# Altium PCB power.PcbDoc
Units mm, origin at the board's own origin, x right, y up, seen from the top; angles counter-clockwise.
Board outline 70 x 48 mm, 2 copper layers (Top Layer, Bottom Layer); 76 components, 42 nets, 185 pads, 23 vias.
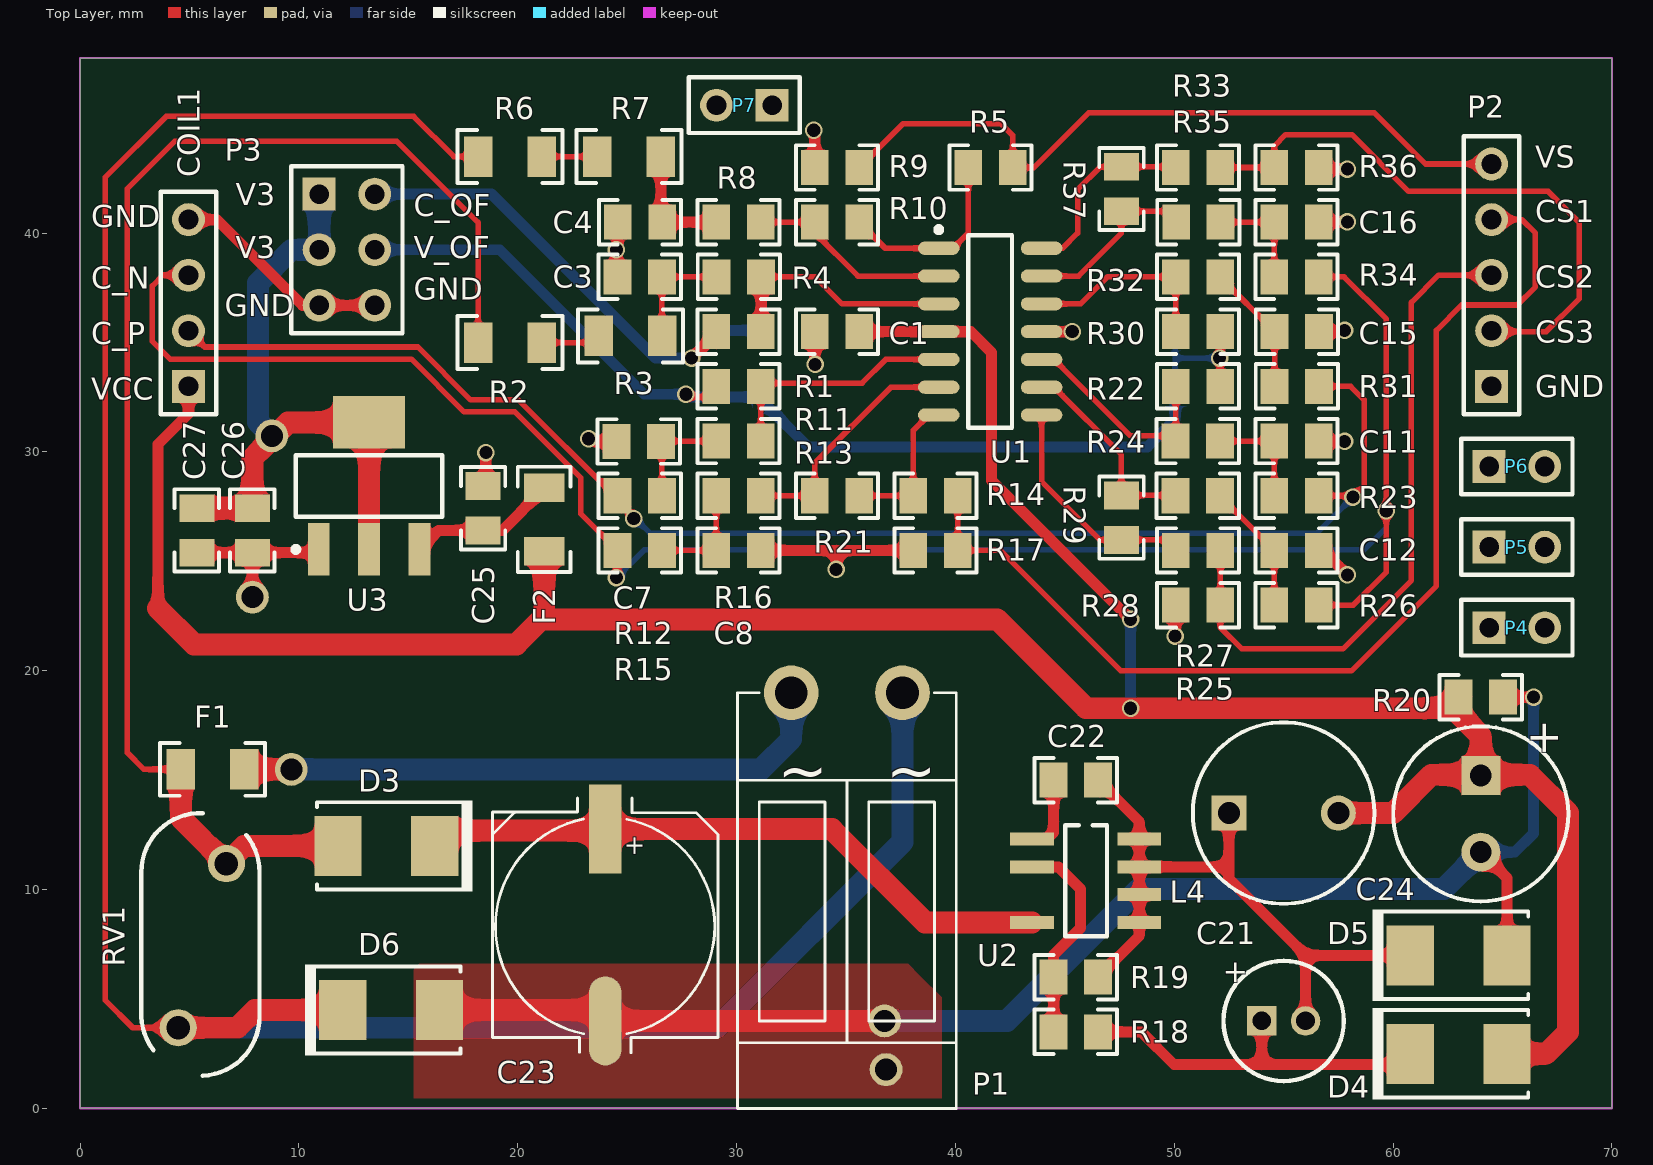
[diagram p0: Top Layer view]
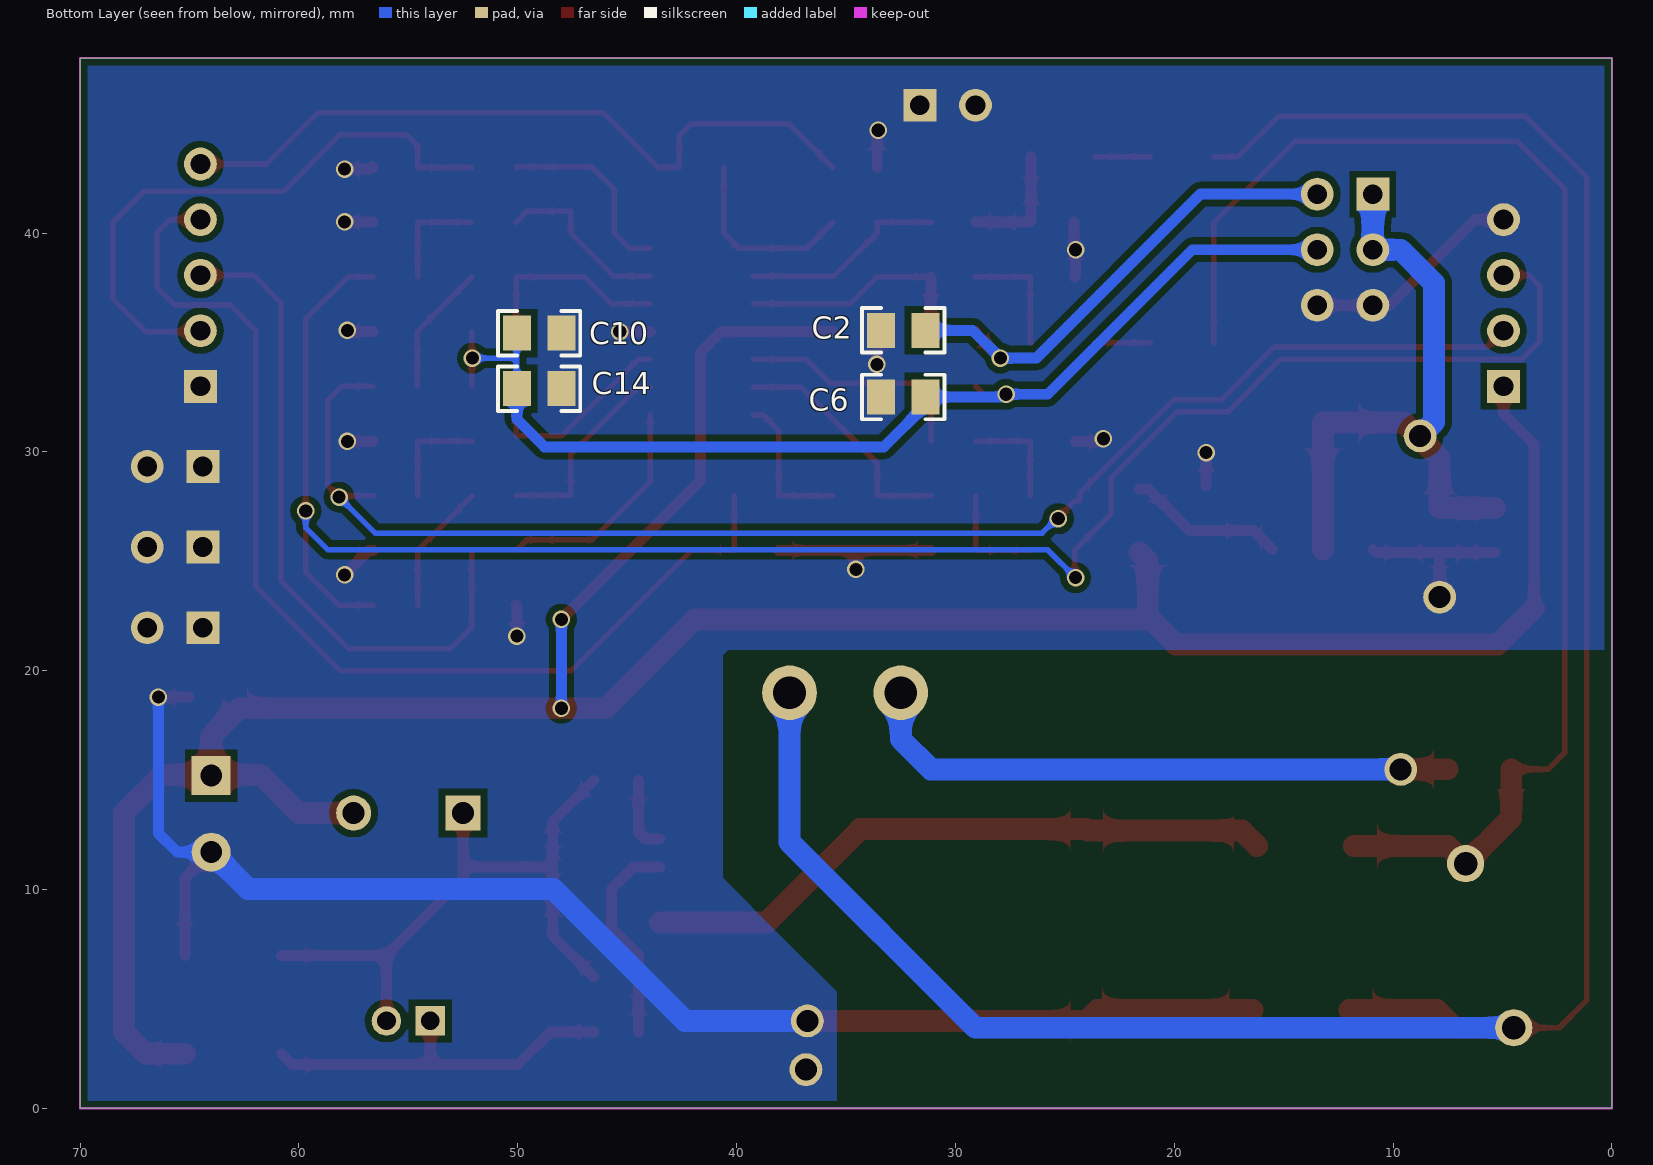
[diagram p1: Bottom Layer view, seen from below]

## Layer stack, top to bottom
Top Solder: solder mask 0.0102, Solder Resist, Dk 3.5
Top Layer: signal copper 0.0356
Dielectric 1: dielectric 0.32, FR-4, Dk 4.8
Bottom Layer: signal copper 0.0356
Bottom Solder: solder mask 0.0102, Solder Resist, Dk 3.5

## Board outline
0,0 0,48 70,48 70,0 69.993,0.007

## Design rules (kind name [scope] priority, off if disabled: settings)
Clearance [All] p1: gap=0.254
HoleSize [All] p1: absolutevalues=TRUE maxlimit=10 minlimit=0.025 maxpercent=80.000 minpercent=20.000
MinimumSolderMaskSliver [All] p1: minsoldermaskwidth=0.1
PolygonConnect [All] p1: connectstyle=Direct reliefconductorwidth=0.254 reliefentries=4 polygonreliefangle="90 Angle" airgapwidth=0.254
RoutingVias [All] p1: holewidth=0.711 width=1.27 viastyle="Through Hole" minholewidth=0.3 minwidth=0.3 maxholewidth=5 maxwidth=5
SilkToSilkClearance [All] p1: silktosilkclearance=0.01
SilkToSolderMaskClearance [IsPad] p1: minsilkscreentomaskgap=0.01 clearancetoexposedcopper=TRUE
SolderMaskExpansion [All] p1: expansion=0.102
Width [All] p1: maxlimit=5 minlimit=0.254 preferedwidth=0.254
26 further rules are at their usual default settings.

## Components (designator, comment, footprint, x,y, rotation, side; value= is the part's Value field where it differs from the comment)
C1 "104" 0805_HV 34.588,35.5 r0 top
C2 "104" 0805_HV 32.385,35.56 r180 bottom
C3 "221" 0805_HV 25.572,38 r0 top
C4 "221" 0805_HV 25.588,40.5 r0 top
C6 "104" 0805_HV 32.385,32.512 r180 bottom
C7 "221" 0805_HV 25.527,30.48 r0 top
C8 "221" 0805_HV 30.088,25.5 r180 top
C10 "104" 0805_HV 49.022,35.433 r0 bottom
C11 "221" 0805_HV 55.588,30.5 r180 top
C12 "221" 0805_HV 55.588,25.5 r180 top
C14 "104" 0805_HV 49.022,32.893 r0 bottom
C15 "221" 0805_HV 55.604,35.5 r180 top
C16 "221" 0805_HV 55.588,40.5 r180 top
C21 "ECA-1HHG100" NHG_500x1100 55,4 r0 top
C22 "104" 0805_HV 45.5,15 r180 top
C23 "400AX6R8M8x11" PANACAP-G-GENERIC 24,8.318 r270 top
C24 "400AX6R8M8x11" CAPPRD350W60D800H1100 64.008,13.462 r270 top
C25 "105" 0805_HV 18.415,27.432 r270 top
C26 "105" 0805_HV 7.874,26.416 r90 top
C27 "105" 0805_HV 5.334,26.416 r90 top
COIL1 "Header 4" HDR1X4 4.953,33 r90 top locked
D3 "US1M-13-F" SMB 14,12 r0 top
D4 "US1M-13-F" SMB 63,2.5 r180 top
D5 "US1M-13-F" SMB 63,7 r180 top
D6 "US1M-13-F" SMB 14.21,4.5 r180 top
F1 "Res" 1206 6.05,15.5 r180 top
F2 "Res" 1206 21.209,26.924 r90 top
L4 "7447480331" IND_WE-TI_8095 55,13.5 r0 top
P1 "Header 2" CON200 35.04,19 r0 top
P2 "Header 5" HDR1X5 64.5,33 r90 top locked
P3 "Header 3X2" HDR2X3 10.922,41.783 r270 top
P4 "Header 2" HDR1X2 64.389,21.971 r0 top
P5 "Header 2" HDR1X2 64.389,25.654 r0 top
P6 "Header 2" HDR1X2 64.389,29.337 r0 top
P7 "Header 2" HDR1X2 31.623,45.847 r180 top
R1 "22K" 0805_HV 30.088,35.5 r180 top
R2 "1.2M" 1206 19.638,35 r0 top
R3 "1.2M" 1206 25.146,35.306 r0 top
R4 "2.2K" 0805_HV 30.104,38 r180 top
R5 "10K" 0805_HV 41.604,43 r180 top
R6 "1.2M" 1206 19.638,43.5 r0 top
R7 "1.2M" 1206 25.088,43.5 r0 top
R8 "2.2K" 0805_HV 30.088,40.5 r180 top
R9 "10K" 0805_HV 34.588,43 r180 top
R10 "22K" 0805_HV 34.588,40.5 r180 top
R11 "22K" 0805_HV 30.088,33 r180 top
R12 "1.2M" 0805_HV 25.572,28 r180 top
R13 "2.2K" 0805_HV 30.088,30.5 r180 top
R14 "10K" 0805_HV 39.088,28 r180 top
R15 "1.2M" 0805_HV 25.572,25.5 r180 top
R16 "2.2K" 0805_HV 30.088,28 r180 top
R17 "10K" 0805_HV 39.088,25.5 r180 top
R18 "13k" 0805_HV 45.5,3.5 r0 top
R19 "2K" 0805_HV 45.5,6 r180 top
R20 "3k3" 0805_HV 64.008,18.796 r180 top
R21 "22K" 0805_HV 34.588,28 r180 top
R22 "22K" 0805_HV 51.088,33 r0 top
R23 "1.2M" 0805_HV 55.588,28 r0 top
R24 "2.2K" 0805_HV 51.072,30.5 r0 top
R25 "10K" 0805_HV 51.088,25.5 r180 top
R26 "1.2M" 0805_HV 55.588,23 r0 top
R27 "2.2K" 0805_HV 51.072,28 r0 top
R28 "10K" 0805_HV 51.088,23 r180 top
R29 "22K" 0805_HV 47.588,27 r90 top
R30 "22K" 0805_HV 51.088,35.5 r0 top
R31 "1.2M" 0805_HV 55.604,33 r0 top
R32 "2.2K" 0805_HV 51.088,38 r0 top
R33 "10K" 0805_HV 51.088,43 r180 top
R34 "1.2M" 0805_HV 55.588,38 r0 top
R35 "2.2K" 0805_HV 51.104,40.5 r0 top
R36 "10K" 0805_HV 55.588,43 r0 top
R37 "22K" 0805_HV 47.588,42.016 r270 top
RV1 "S10K275E2" VAR_S10K275E2 5.5,7.5 r90 top
U1 "LM324" D014_L 41.588,35.5 r0 top
U2 "LNK306" "SOP 7" 43.5,12.31 r0 top
U3 "AMS1117-3.3V SOT223 _MH" SOT223 13.208,28.448 r0 top

## Footprints (in the part's own frame and the unit in brackets; to place one, negate y for a bottom-side part, rotate by r counter-clockwise, add the part's x,y. Pads: shape width x height; smd on the part's side, far side on the other; paste and mask are expansions set on the pad)
0805_HV [mil] "0805 with 30mil clearance between pads"
  rect 50x63 smd: 1(-40,0) 2(40,0)
  silkscreen extent -74,-40 74,40, body extent -43,-29 43,29, height 57
1206 [mm] "1206 from SM-752 data"
  rect 1.3x1.85 smd: 1(1.45,0) 2(-1.45,0)
  silkscreen extent -2.4,-1.21 2.4,1.21, body extent -1.7,-0.9 1.7,0.9, height 1.35
CAPPRD350W60D800H1100 [mm] "Capacitor, Alum, 8x11mm"
  rect 1.78x1.78 hole 1: 1(-1.75,0)
  round 1.78 hole 1: 2(1.75,0)
  silkscreen extent -4,-4 4,4, body extent -4.03,-4.03 4.03,4.02, height 11.79
CON200 [mm]
  round 2.5 hole 1.5: 1(-2.54,0) 2(2.54,0)
  silkscreen extent -5,-19 5,0
D014_L [mm] "14-Pin Small Outline Integrated Circuit 1.27 mm Pitch, IPC High Density"
  oval 1.9x0.6 smd: 1(-2.35,3.81) 2(-2.35,2.54) 3(-2.35,1.27) 4(-2.35,0) 5(-2.35,-1.27) 6(-2.35,-2.54) 7(-2.35,-3.81) 8(2.35,-3.81) 9(2.35,-2.54) 10(2.35,-1.27) 11(2.35,0) 12(2.35,1.27) 13(2.35,2.54) 14(2.35,3.81)
  silkscreen extent -2.47,-4.4 1,4.78, body extent -1.95,-4.33 1.95,4.33, height 1.75
HDR1X2 [mm] "Connector; Header; 2 Position"
  rect 1.5x1.5 hole 0.9: 1(0,0)
  round 1.5 hole 0.9: 2(2.54,0)
  silkscreen extent -1.27,-1.27 3.81,1.27
HDR1X4 [mm] "Connector; Header; 4 Position"
  rect 1.5x1.5 hole 0.9: 1(0,0)
  round 1.5 hole 0.9: 2(2.54,0) 3(5.08,0) 4(7.62,0)
  silkscreen extent -1.27,-1.27 8.89,1.27
HDR1X5 [mm] "Connector; Header; 5 Position"
  rect 1.5x1.5 hole 0.9: 1(0,0)
  round 1.5 hole 0.9: 2(2.54,0) 3(5.08,0) 4(7.62,0) 5(10.16,0)
  silkscreen extent -1.27,-1.27 11.43,1.27
HDR2X3 [mm] "Connector; Header; 3x2 Position"
  rect 1.5x1.5 hole 0.9: 1(0,0)
  round 1.5 hole 0.9: 2(0,2.54) 3(2.54,0) 4(2.54,2.54) 5(5.08,0) 6(5.08,2.54)
  silkscreen extent -1.27,-1.27 6.35,3.81
IND_WE-TI_8095 [mm] "Wurth WE-TI 8095"
  rect 1.6x1.6 hole 1: 1(-2.5,0)
  round 1.6 hole 1: 2(2.5,0)
  silkscreen extent -4.15,-4.15 4.15,4.15, body extent -4.15,-4.15 4.15,4.15, height 10
NHG_500x1100 [mm] "TH, 2-Leads, Dia 5mm,  Lead Spacing 2mm"
  rect 1.35x1.35 hole 0.85: 1(-1,0)
  round 1.35 hole 0.85: 2(1,0)
  silkscreen extent -2.75,-2.75 2.75,2.75, body extent -2.73,-2.75 2.75,2.75, height 12.51
PANACAP-G-GENERIC [mil]
  rect 160x59.06 smd: 1(-175,0)
  oval 160x59.06 smd: 2(170,0)
  silkscreen extent -231,-203 227,203, body extent -233,-203 223,203, height 402
SMB [mm] "Molded Diode, 2-Leads, Body 5.4x3.6mm, IPC Medium Density, based on OnSemi component dimensions"
  rect 2.159x2.743 smd: 1(2.21,0) 2(-2.21,0)
  silkscreen extent -3.17,-2.08 3.94,2.08, body extent -2.7,-1.8 2.7,1.8, height 2.32
"SOP 7" [mm]
  rect 2x0.6 smd: 1(0,0) 2(0,-1.27) 4(0,-3.81) 5(4.9,-3.81) 6(4.9,-2.54) 7(4.9,-1.27) 8(4.9,0)
  silkscreen extent 1.52,-4.44 3.43,0.64
SOT223 [mm]
  rect 1x2.4 smd: 1(-2.3,-2.9) 2(0,-2.9) 3(2.3,-2.9)
  rect 3.3x2.4 smd: 4(0,2.9)
  silkscreen extent -3.47,-3.02 3.35,1.4, body extent -3.25,-3.56 3.25,3.4, height 1.68
VAR_S10K275E2 [mm] "EPCOS"
  round 1.7 hole 1.067: 1(-3.81,1.016) 2(3.69,-1.184)
  silkscreen extent -6,-2.7 6,2.7, body extent -5.98,-2.7 5.98,2.7, height 14.99

## Part data
C1 C2 C3 C4 C6 C7 C8 C10 C11 C12 C14 C15 C16 C22 C25 C26 C27: library part CM, "Cap SMD"
C21: "CAP, AL, 10 µF, 50 V, +/- 20%, TH"
C23 C24: "CAP, AL, 6.8uF, 400V, +/-20%, TH"
COIL1: "Header, 4-Pin"
D3 D4 D5 D6: library part MURS160-13-F, "Diode, Ultrafast, 600V, 1A, SMB"
F1 F2: library part Res-SMD, "Resistor"
L4: "Inductor, Wirewound, Ferrite, 330 µH, 1.4 A, 0.3 ohm, TH"
P1 P4 P5 P6 P7: "Header, 2-Pin"
P2: "Header, 5-Pin"
P3: "Header, 3-Pin, Dual row"
R1 R2 R3 R4 R5 R6 R7 R8 R9 R10 R11 R12 R13 R14 R15 R16 R17 R18 R19 R20 R21 R22 R23 R24 R25 R26 R27 R28 R29 R30 R31 R32 R33 R34 R35 R36 R37: library part R, "Resistor 1/4W"
RV1: "Varistor 275V RMS 10MM Radial, TH"
U1: library part LM324_MH, "Op x 4"
U2: library part Component_1

## Free pads (board coordinates)
  round 1.5 hole 1: 0(9.652,15.494) 0(36.83,1.778) 1(7.874,23.368) 2(8.763,30.734) 4(36.766,4)

## Via types
v1: diameter 0.8, hole 0.6, Top Layer to Bottom Layer, tented both sides, 23 vias

## Nets (pads, with @x,y where several pads share a name; then routed paths per layer and width w, separated by ;. In a path a pad name is that pad's centre, name@x,y a point inside that pad or via, vN(x,y) a via of type N, cw(c..) or ccw(c..) an arc to the next point about the centre after c; other vN are vias at no path point)
BP: C22.2 U2.1 | length 3.5
  Top Layer w0.5: U2.1 44.187,12.31 44.484,12.607 C22.2
C1: R14.2 R21.1 U1.7 | length 6.9
  Top Layer w0.254: R21.1 R14.2 38.072,30.984 38.778,31.69 U1.7
C2: R25.2 R29.1 U1.8 | length 10.5
  Top Layer w0.254: U1.8 43.938,28.65 46.604,25.984 R29.1 49.588,25.984 R25.2
C3: R33.2 R37.1 U1.14 | length 8.9
  Top Layer w0.254: U1.14 44.898,39.31 45.588,40 45.588,42 46.62,43.032 R37.1 50.04,43.032 R33.2
CUR_N: COIL1.3 R15.2 R26.2 R34.2 | length 87.9
  Top Layer w0.254: COIL1.3 3.79,38.08 3.302,37.592 3.302,35.052 4.11,34.244 15.138,34.244 17.551,31.831 19.866,31.831 22.882,28.815 22.882,27.174 R15.2 24.556,24.302 v1(24.511,24.257) ; R26.2 58.179,23 59.69,24.511 v1(59.69,27.305) 59.69,36.068 57.758,38 R34.2
  Bottom Layer w0.254: v1(24.511,24.257) 25.781,25.527 58.674,25.527 59.69,26.543 v1(59.69,27.305)
CUR_P: COIL1.2 R12.2 R23.2 R31.2 | length 66.6
  Top Layer w0.254: COIL1.2 5.695,34.798 15.432,34.798 17.845,32.385 20.03,32.385 24.324,28.091 24.324,27.768 24.556,27.768 v1@25.37,26.954 ; v1(25.299,26.954) v1@25.37,26.954 ; v1@25.4,26.924 v1@25.37,26.954 ; R23.2 58.226,28 58.674,28.448 58.674,32.385 58.059,33 R31.2
  Bottom Layer w0.254: v1(25.299,26.954) 25.37,26.954 26.035,26.289 56.515,26.289 v1(58.166,27.94)
CURRENT_SIGNAL1: P2.4 R14.1 R17.1 | length 50
  Top Layer w0.254: R14.1 R17.1 42.064,25.5 47.564,20 58.1,20 61.976,23.876 61.976,35.56 63.133,36.717 65.673,36.717 66.5,37.544 66.5,40 65.88,40.62 P2.4
CURRENT_SIGNAL2: P2.3 R25.1 R28.1 | length 30.8
  Top Layer w0.254: R25.1 R28.1 52.104,21.984 53.088,21 57.703,21 60.833,24.13 60.833,36.83 62.083,38.08 P2.3
CURRENT_SIGNAL3: P2.2 R33.1 R36.1 | length 27.4
  Top Layer w0.254: R33.1 R36.1 54.572,43.984 55.088,44.5 58.116,44.5 60.706,41.91 67.09,41.91 68.5,40.5 68.5,37 67,35.5 64.54,35.5 P2.2
FB: R18.1 R19.2 U2.2 | length 9.7
  Top Layer w0.5: U2.2 44.713,11.04 45.72,10.033 45.72,8.255 44.484,7.019 R18.1
GND: C1.1 C2.1 C3.1 C4.1 C6.1 C7.1 C8.1 C10.1 C11.1 C12.1 C14.1 C15.1 C16.1 C23.2 C24.2 C25.1 C26.1 C27.1 COIL1.4 D5.2 D6.2 P2.1 P3.5 P3.6 P4.1 P4.2 P5.1 P5.2 P6.1 P6.2 P7.1 P7.2 pad.0@36.83,1.778 pad.1 pad.4 R9.2 R17.2 R20.1 R28.2 R36.2 U1.11 U3.1 | length 110.6
  Top Layer w0.5: COIL1.4 6.243,40.62 10.16,36.703 P3.5 P3.6 ; C27.1 10.76,25.4 U3.1 ; pad.1 C26.1 ; C25.1@18.542,28.448 v1(18.542,29.972) ; v1(23.241,30.607) 23.368,30.48 C7.1 ; C3.1 24.511,38.045 v1(24.511,39.243) 24.572,39.304 C4.1 ; C8.1 34.588,25.5 ; v1(33.528,44.704) 33.572,44.66 R9.2 ; C1.1 33.572,34.016 v1(33.588,34) ; v1(34.544,24.638) 34.588,24.682 34.588,25.5 ; R17.2 34.588,25.5 ; U1.11 v1(45.339,35.5) ; v1(50.038,21.59) 50.038,22.966 R28.2 ; C12.1 56.796,25.5 v1(57.912,24.384) ; C11.1 56.624,30.48 v1(57.785,30.48) ; C16.1 56.617,40.513 v1(57.912,40.513) ; R36.2 56.657,43.053 56.784,42.926 v1(57.912,42.926) ; C15.1 57.725,35.5 v1(57.785,35.56) ; C24.2@64,11.75 65.21,10.54 D5.2 ; R20.1 v1(66.421,18.796)
  Top Layer w1: D6.2 23.5,4.5 C23.2 pad.4
  Bottom Layer w0.5: C24.2 65.56,11.712 66.421,12.573 v1(66.421,18.796)
  Bottom Layer w1: pad.4 42.354,4 48.387,10.033 62.329,10.033 C24.2
L: F1.2 P1.1 pad.0@9.652,15.494 | length 27.7
  Top Layer w1: F1.2 9.646,15.5 pad.0@9.652,15.494
  Bottom Layer w1: pad.0@9.652,15.494 31.115,15.494 32.5,16.879 P1.1
LL: D3.2 F1.1 R2.2 RV1.2 | length 63.1
  Top Layer w0.254: F1.1 2.915,15.5 2.159,16.256 2.159,42.037 4.318,44.196 14.478,44.196 18.188,40.486 R2.2
  Top Layer w1: F1.1 4.6,13.274 RV1.2 7.494,12 D3.2
MCU_VCC: C26.2 C27.2 P3.1 P3.3 pad.2 U3.2 U3.4 | length 29.8
  Top Layer w1: C27.2@5.334,27.432 C26.2 7.874,29.718 9.504,31.348 U3.4 U3.2
  Bottom Layer w1: pad.2 8.128,31.369 8.128,37.719 9.652,39.243 P3.3 P3.1
N: D6.1 P1.2 R6.2 RV1.1 | length 111.8
  Top Layer w0.254: RV1.1 2.406,3.69 1.143,4.953 1.143,42.545 3.937,45.339 15.24,45.339 17.079,43.5 R6.2
  Top Layer w1: RV1.1 7.19,3.69 8,4.5 D6.1 ; P1.2@37.5,19 P1.2
  Bottom Layer w1: RV1.1 29.09,3.69 37.58,12.18 P1.2
NetC3_2: C3.2 R3.1 R4.2 | length 5.5
  Top Layer w0.254: R3.1@26.538,35 26.588,35.05 C3.2 R4.2
NetC4_2: C4.2 R7.1 R8.2 | length 5.5
  Top Layer w0.5: R7.1 26.538,40.566 C4.2 R8.2
NetC7_2: C7.2 R12.1 R13.2 | length 5
  Top Layer w0.254: R12.1 26.588,30.5 R13.2
NetC8_2: C8.2 R15.1 R16.2 | length 5
  Top Layer w0.254: R15.1 C8.2 R16.2
NetC11_2: C11.2 R23.1 R24.2 | length 5
  Top Layer w0.254: R24.2 C11.2 R23.1
NetC12_2: C12.2 R26.1 R27.2 | length 6
  Top Layer w0.254: R27.2 52.088,27.984 C12.2 R26.1
NetC15_2: C15.2 R31.1 R32.2 | length 6
  Top Layer w0.254: R32.2 52.104,37.984 C15.2 R31.1
NetC16_2: C16.2 R34.1 R35.2 | length 5
  Top Layer w0.254: R35.2 C16.2 R34.1
NetC21_1: C21.1 D4.1 R18.2 | length 17.1
  Top Layer w0.5: R18.2 48.5,3.5 50,2 54,2 ; C21.1 54,2 ; D4.1 60.29,2 54,2
NetC25_2: C25.2 F2.1 U3.3 | length 7.2
  Top Layer w0.5: U3.3 16.376,26.416 C25.2 19.304,26.416 21.188,28.3 F2.1@21.59,28.3
NetR1_1: R1.1 R4.1 U1.3 | length 11.1
  Top Layer w0.254: R4.1 33.588,38 34.818,36.77 U1.3
  Top Layer w0.5: R1.1 31.12,35.516 R4.1
NetR2_1: R2.1 R3.2 | length 2.5
  Top Layer w0.254: R2.1 R3.2@23.638,35
NetR6_1: R6.1 R7.2 | length 2.5
  Top Layer w0.254: R6.1 R7.2
NetR8_1: R8.1 R10.2 U1.2 | length 9.4
  Top Layer w0.254: R8.1 R10.2 33.572,40.016 35.548,38.04 U1.2
NetR11_1: R11.1 R13.1 U1.5 | length 11.1
  Top Layer w0.254: R13.1 R11.1 31.251,33.147 35.735,33.147 36.818,34.23 U1.5
NetR16_1: R16.1 R21.2 U1.6 | length 11.1
  Top Layer w0.254: R16.1 R21.2 33.572,29.484 37.048,32.96 U1.6
NetR22_1: R22.1 R24.1 U1.10 | length 9.8
  Top Layer w0.254: U1.10 44.51,34.23 48.006,30.734 50.072,30.734 R22.1
NetR27_1: R27.1 R29.2 U1.9 | length 9.3
  Top Layer w0.254: U1.9 44.51,32.96 47.588,29.882 R29.2 50.04,28.016 R27.1
NetR30_1: R30.1 R32.1 U1.12 | length 9.1
  Top Layer w0.254: U1.12 45.72,36.77 46.95,38 R32.1 R30.1
NetR35_1: R35.1 R37.2 U1.13 | length 8.2
  Top Layer w0.254: U1.13 45.628,38.04 47.588,40 R37.2 49.588,41 R35.1
S: C21.2 C22.1 D5.1 L4.1 R19.1 U2.5 U2.6 U2.7 U2.8 | length 30.4
  Top Layer w0.5: R19.1 48.4,7.884 U2.5 U2.6 U2.7 ; C22.1 48.4,13.116 U2.8 U2.7 ; L4.1 52.5,11.04 ; C21.2 56,7 ; D5.1 56,7 ; U2.7 52.5,11.04 ; 52.5,11.04 52.5,10.5 56,7
V1: R5.2 R10.1 U1.1 | length 8.8
  Top Layer w0.254: R10.1 36.794,39.31 U1.1 39.898,39.31 40.588,40 R5.2
VCC_RELAY: C1.2 C24.1 COIL1.1 D4.2 F2.2 L4.2 R20.2 U1.4 | length 130
  Top Layer w0.5: 3.556,22.86 3.556,30.353 4.953,31.75 COIL1.1 ; C1.2 U1.4 40.7,35.5 41.656,34.544 41.656,28.702 v1(48.006,22.352)
  Top Layer w1: 3.556,22.86 5.207,21.209 19.939,21.209 21.082,22.352 21.209,22.352 ; F2.2@21.59,25.4 21.209,25.019 21.209,22.352 ; L4.2 60,13.5 61.75,15.25 C24.1@64.008,15.25 ; C24.1 C24.1@64.008,15.25 ; D4.2 67,2.5 68,3.5 68,13.5 66.25,15.25 C24.1@64.008,15.25 ; 21.209,22.352 41.91,22.352 45.974,18.288 v1(48.006,18.288) 62.738,18.288 64.008,17.018 C24.1@64.008,15.25
  Bottom Layer w0.5: v1(48.006,18.288) v1(48.006,22.352)
VIN1: C23.1 D3.1 U2.4 | length 29.4
  Top Layer w1: D3.1 16.91,12.7 23.937,12.7 C23.1 34.354,12.763 38.617,8.5 U2.4
VOFFSET_CURRENT: C6.2 C10.2 C14.2 P3.4 R11.2 R22.2 R30.2 | length 51.2
  Top Layer w0.254: v1(27.686,32.639) 27.813,32.512 28.584,32.512 R11.2 ; R22.2 R30.2
  Bottom Layer w0.254: C14.2@50.038,32.893 50.038,34.29 ; C10.2 50.038,34.29 ; v1(52.07,34.29) 50.038,34.29
  Bottom Layer w0.5: P3.4 19.177,39.243 25.781,32.639 v1(27.686,32.639) 27.813,32.512 C6.2 31.369,32.131 33.274,30.226 48.768,30.226 50.038,31.496 C14.2
VOFFSET_VOL: C2.2 P3.2 R1.2 | length 23.2
  Top Layer w0.5: v1(27.94,34.29) 29.072,35.422 R1.2
  Bottom Layer w0.5: P3.2 18.796,41.783 26.289,34.29 v1(27.94,34.29) 29.21,35.56 C2.2
VOL_SIGNAL: P2.5 R5.1 R9.1 | length 33.4
  Top Layer w0.254: R9.1 37.604,45 42.088,45 42.62,44.468 R5.1 43.588,43 46.088,45.5 59.148,45.5 61.488,43.16 P2.5

## Polygon pours and split planes (outlines as drawn)
GND on Bottom Layer "Bottom Layer-No Net" (solid, remove dead copper, pour order 2): 0,48 0,44.069 0,20.955 0.508,20.955 40.386,20.955 40.64,20.701 40.64,18.415 40.64,10.541 37.973,7.874 35.433,5.334 35.433,1.651 35.433,0 69.987,0 69.993,0.007 69.993,47.993 70,48
GND on Top Layer "Bottom Layer-No Net" (solid, remove dead copper, pour order 4): 15.24,6.35 15.24,0.134 15.113,0.007 39.37,0.007 39.37,5.08 38.354,6.096 37.846,6.604 22.606,6.604 15.494,6.604 15.24,6.35

## Keep-outs
Keep-Out Layer:
  the board outline again, w0.1

## Silkscreen, mask and mechanical layers (free items; w line width, h text height)
Top Overlay:
  text "VS" at 66.5,43 h1
  text "V3" at 7.112,41.275 h1
  text "C_OF" at 15.24,40.767 h1
  text "CS1" at 66.5,40.5 h1
  text "GND" at 0.508,40.259 h1
  text "V3" at 7.112,38.862 h1
  text "V_OF" at 15.24,38.862 h1
  text "CS2" at 66.5,37.5 h1
  text "C_N" at 0.508,37.465 h1
  text "GND" at 15.24,36.957 h1
  text "GND" at 6.604,36.195 h1
  text "CS3" at 66.5,35 h1
  text "C_P" at 0.508,34.925 h1
  text "GND" at 66.5,32.5 h1
  text "VCC" at 0.508,32.385 h1
  text "~" at 31.877,14.478 h2
  text "~" at 36.83,14.478 h2

## Text inside footprints (layer, text, board x,y; h text height)
C21: Top Overlay "+" at 52.206,5.778 h1.02; Mechanical 5 "+" at 51.2,3.6 h1.02
C23: Top Overlay "+" at 24.975,12.518 h0.89 r270
C24: Top Overlay "+" at 66.294,17.78 h1.5 r270; Mechanical 5 "+" at 64.008,18.962 h1.5 r270